# Altium PCB PCB2.PcbDoc
Units mil, origin at the board's own origin, x right, y up, seen from the top; angles counter-clockwise.
Board outline 6000 x 4000 mil, 2 copper layers (Top Layer, Bottom Layer); 27 components, 31 nets, 133 pads, 31 vias.
Unrouted connection lines stored in the file: 8.
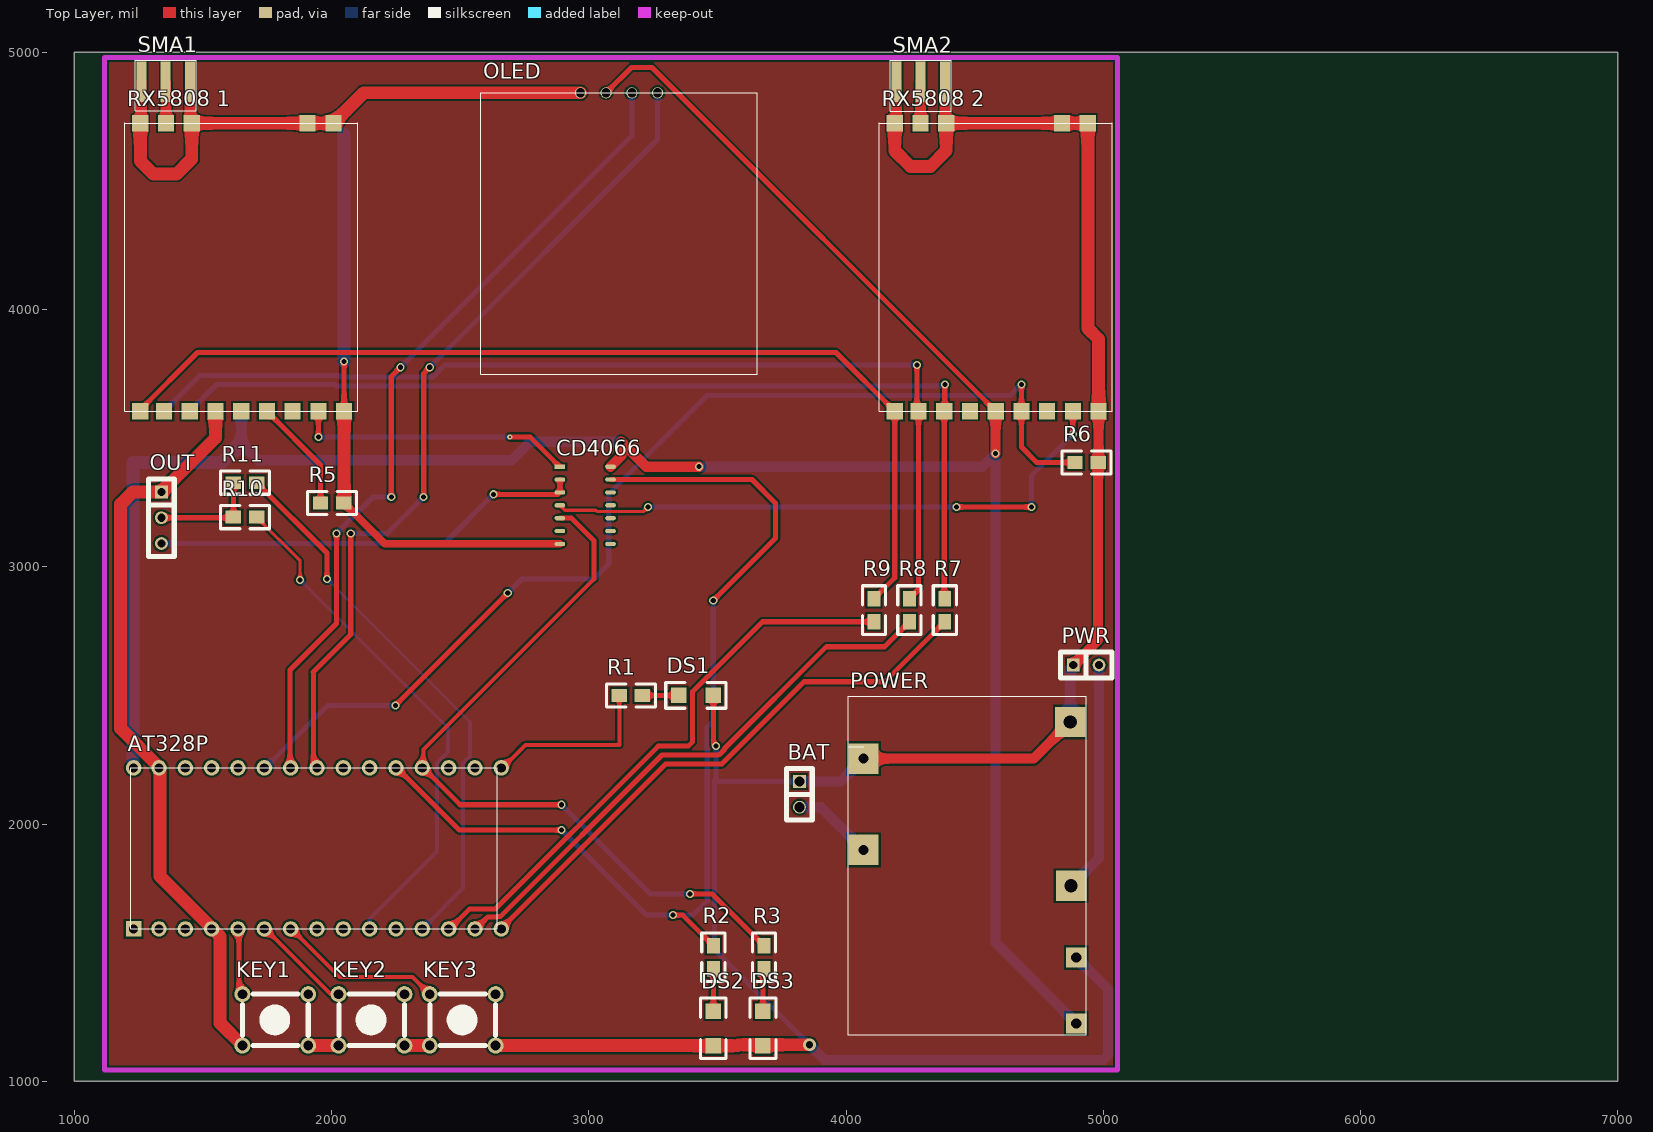
[diagram p0: Top Layer view]
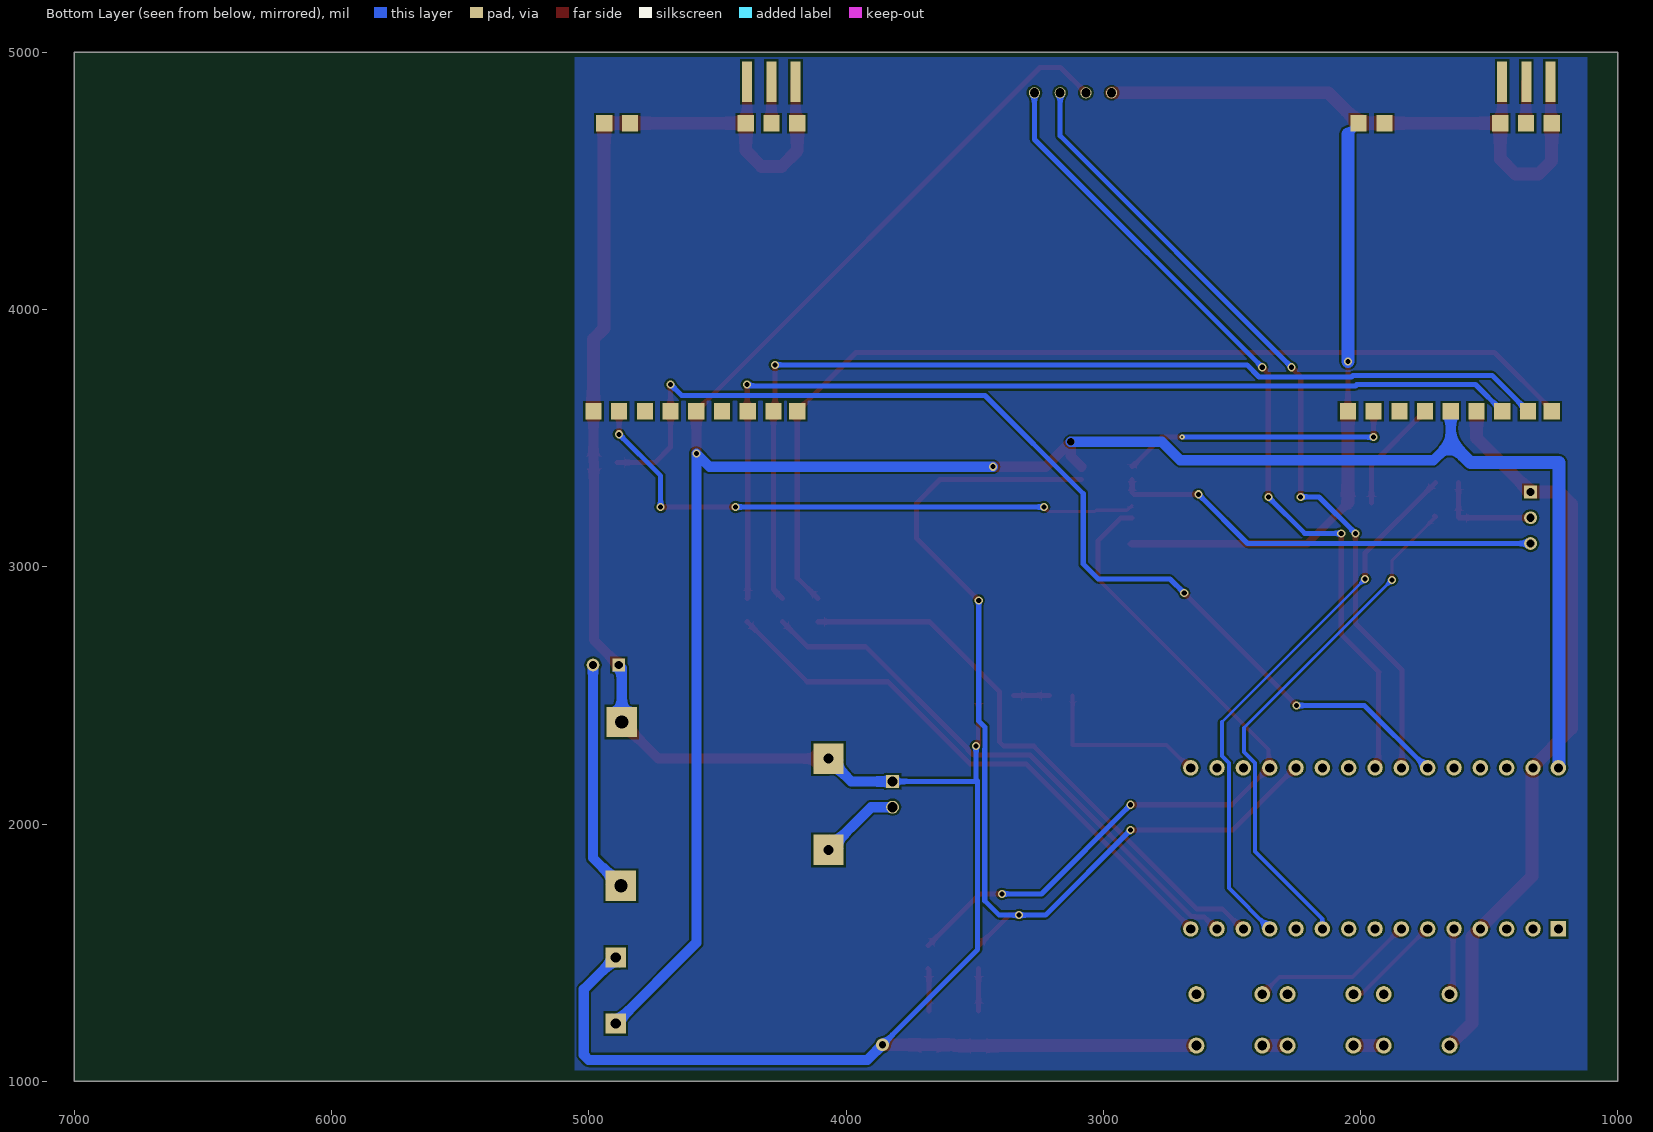
[diagram p1: Bottom Layer view, seen from below]

## Layer stack, top to bottom
Top Solder: solder mask 0.4, Solder Resist, Dk 3.5
Top Layer: signal copper 1.4
Dielectric 1: dielectric 12.6, FR-4, Dk 4.8
Bottom Layer: signal copper 1.4
Bottom Solder: solder mask 0.4, Solder Resist, Dk 3.5

## Board outline
1000,1000 7000,1000 7000,5000 1000,5000

## Design rules (kind name [scope] priority, off if disabled: settings)
Clearance [All] p1: gap=7.87 ignorepadtopadclearanceinfootprint=FALSE
PolygonConnect [All] p1: connectstyle=Relief reliefconductorwidth=10 reliefentries=4 polygonreliefangle="90 Angle" airgapwidth=10
RoutingVias [All] p1: holewidth=28 width=50 viastyle="Through Hole" minholewidth=28 minwidth=50 maxholewidth=28 maxwidth=50
SolderMaskExpansion [All] p1: expansion=4
Width [All] p1: maxlimit=19.68 minlimit=15.75 preferedwidth=19.68
30 further rules are at their usual default settings.

## Components (designator, comment, footprint, x,y, rotation, side; value= is the part's Value field where it differs from the comment)
AT328P "328P" 328 1230.98,1590.87 r90 top
BAT "CON2" SIP2#1 3818.9,2165.35 r270 top
CD4066 "CD4066" 4066 2887.72,3388.98 r0 top
DS1 "LED1" 1206 3349.25,2500 r0 top
DS2 "LED2" 1206 3484.25,1272.79 r270 top
DS3 "LED3" 1206 3677.17,1272.79 r270 top
KEY1 "UP" KEY_M 1909.45,1138.58 r180 top
KEY2 "MODE" KEY_M 2283.46,1138.58 r180 top
KEY3 "DOWN" KEY_M 2637.8,1138.58 r180 top
OLED "OLED" oled 2580.04,4842.52 r0 top
OUT "CON3" SIP3 1338.58,3290.55 r270 top
POWER "POWER" power 4009.06,1181.5 r90 top
PWR "CON1" SIP2#2 4883.46,2618.11 r0 top
R1 "330" 0805 3118.66,2500.06 r0 top
R2 "330" 0805 3484.32,1527.01 r270 top
R3 "330" 0805 3681.17,1527.01 r270 top
R5 "100K" 0805 2047.24,3248.03 r180 top
R6 "100K" 0805 4980.31,3405.51 r180 top
R7 "1K" 0805 4384.2,2876.22 r270 top
R8 "1K" 0805 4246.4,2876.22 r270 top
R9 "1K" 0805 4108.61,2876.22 r270 top
R10 "470" 0805 1618.66,3192.98 r0 top
R11 "1K" 0805 1618.66,3326.84 r0 top
"RX5808 1" "RX5808" rx5808 1256.06,4729.41 r0 top
"RX5808 2" "RX5808" rx5808 4189.13,4729.41 r0 top
SMA1 "SMA" SMA 1237.01,4807.48 r0 top
SMA2 "SMA" SMA 4172.05,4806.69 r0 top

## Footprints (in the part's own frame and the unit in brackets; to place one, negate y for a bottom-side part, rotate by r counter-clockwise, add the part's x,y. Pads: shape width x height; smd on the part's side, far side on the other; paste and mask are expansions set on the pad)
328 [mil]
  rect 60x60 hole 35.43: 1(1.26,0.28)
  round 60 hole 35.43: 2(1.26,-98.15) 3(1.26,-200.51) 4(1.26,-302.87) 5(1.26,-405.24) 6(1.26,-507.6) 7(1.26,-609.96) 8(1.26,-712.32) 9(1.26,-814.68) 10(1.26,-917.05) 11(1.26,-1019.41) 12(1.26,-1121.77) 13(1.26,-1224.13) 14(1.26,-1326.5) 15(1.26,-1428.86) 16(627.32,-1428.9) 17(627.32,-1326.54) 18(627.32,-1224.17) 19(627.32,-1121.81) 20(627.32,-1019.45) 21(627.32,-917.09) 22(627.32,-814.72) 23(627.32,-712.36) 24(627.32,-610) 25(627.32,-507.64) 26(627.32,-405.28) 27(627.32,-302.91) 28(627.32,-200.55) 29(627.32,-98.19) 30(627.32,0.24)
  silkscreen extent 1,-1413 627,12
0805 [mil]
  rect 60x50 smd: 1(0,-0.06) 2(90,-0.06)
  silkscreen extent -50,-45 140,45
1206 [mil]
  rect 60x60 smd: 1(0,0) 2(135,0)
  silkscreen extent -50,-50 185,50
4066 [mm]
  rect 1.05x0.42 smd: 1(0,0)
  oval 1.05x0.42 smd: 2(0,-1.27) 3(0,-2.54) 4(0,-3.81) 5(0,-5.08) 6(0,-6.35) 7(0,-7.62) 8(5,-7.62) 9(5,-6.35) 10(5,-5.08) 11(5,-3.81) 12(5,-2.54) 13(5,-1.27) 14(5,0)
KEY_M [mil]
  round 62 hole 38: 1(0,0) 1(255.91,0) 2(0,-200) 2(255.91,-200)
  silkscreen extent 0,-200 255,0
oled [mm]
  round 1.1 hole 0.9: 1(9.84,0) 2(12.38,0) 3(14.92,0) 4(17.467,0)
  silkscreen extent 0,-27.8 27.3,0
power [mm]
  rect 2x2 hole 1: 1(1.1,-22.5) 2(7.6,-22.5)
  rect 3x3 hole 1.3: 3(14.69,-22) 4(30.86,-21.91)
  rect 3x3 hole 1: 5(27.24,-1.5) 6(18.24,-1.5)
  silkscreen extent 0,-23.5 33.4,0.06
rx5808 [mm]
  rect 1.6x1.6 all layers, no hole: 1(0.016,-28.575) 2(2.356,-28.575) 3(4.896,-28.575) 4(7.436,-28.575) 5(9.976,-28.575) 6(12.516,-28.575) 7(15.056,-28.575) 8(17.596,-28.575) 9(20.136,-28.575) 10(0.016,-0.143) 11(2.556,-0.127) 12(5.096,-0.127) 13(16.536,-0.127) 14(19.076,-0.127)
  silkscreen extent -1.52,-28.58 21.48,-0.08
SIP2#1 [mm]
  rect 1.27x1.27 hole 1: 1(0,0)
  round 1.27 hole 1: 2(2.54,0)
  silkscreen extent -1.27,-1.27 3.81,1.27
SIP2#2 [mm]
  rect 1.27x1.27 hole 0.813: 1(0,0)
  round 1.27 hole 0.813: 2(2.54,0)
  silkscreen extent -1.27,-1.27 3.81,1.27
SIP3 [mil]
  rect 50x50 hole 32: 1(0,0)
  round 50 hole 32: 2(100,0) 3(200,0)
  silkscreen extent -50,-50 250,50
SMA [mm]
  rect 1x4 all layers, no hole: 1(0.61,2) 2(3,2) 3(5.39,2)
  silkscreen extent 0,-0.89 6,4.11

## Part data
DS1 DS3: library part LED2, "Typical RED, GREEN, YELLOW, AMBER GaAs LED", PackageDocument=Feb-2002, LatestRevisionDate=17-Jul-2002, LatestRevisionNote="Re-released for DXP Platform.", PackageReference=3.2X1.6X1.1, Published=8-Jun-2000, Publisher="Altium Limited"
DS2: "Typical RED, GREEN, YELLOW, AMBER GaAs LED", PackageDocument=Feb-2002, LatestRevisionDate=17-Jul-2002, LatestRevisionNote="Re-released for DXP Platform.", PackageReference=3.2X1.6X1.1, Published=8-Jun-2000, Publisher="Altium Limited"
KEY1 KEY2 KEY3: library part KEY_M
PWR: library part CON2
R1 R2 R3 R5 R6 R7 R8 R9 R10 R11: library part R
SMA1 SMA2: library part Component_1

## Via types
v1: diameter 31.5, hole 19.68, Top Layer to Bottom Layer, 28 vias
v2: diameter 28, hole 28, Top Layer to Bottom Layer, 1 vias
v3: diameter 19.68, hole 7.87, Top Layer to Bottom Layer, 1 vias
v4: diameter 50, hole 28, Top Layer to Bottom Layer, 1 vias

## Nets (pads, with @x,y where several pads share a name; then routed paths per layer and width w, separated by ;. In a path a pad name is that pad's centre, name@x,y a point inside that pad or via, vN(x,y) a via of type N, cw(c..) or ccw(c..) an arc to the next point about the centre after c; other vN are vias at no path point)
+5: "RX5808 1.5" "RX5808 2.5" AT328P.30 CD4066.14 OLED.2 POWER.1 | length 9547.6
  Top Layer w20: OLED.2 3165.87,4940.94 3245.35,4940.94 4581.89,3604.41
  Top Layer w39.37: CD4066.14 3126.38,3430.79 v2(3126.38,3485.83) 3223.23,3388.98 v1(3428.35,3388.98) ; v1(4581.89,3440.16) 4581.89,3604.41
  Bottom Layer w19.68: AT328P.30@1228.35,2220.59 AT328P.30
  Bottom Layer w39.37: 1648.82,3604.41 1648.82,3481.61 1716.46,3413.98 2700.91,3413.98 2772.76,3485.83 v2(3126.38,3485.83) ; v1(3428.35,3388.98) 4530.71,3388.98 v1(4581.89,3440.16) 4581.89,1537.8 POWER.1
  Bottom Layer w50: AT328P.30@1228.35,2220.59 1228.35,3405.58 1572.78,3405.58 1648.82,3481.61
GND: "RX5808 1.4" "RX5808 1.9" "RX5808 1.10" "RX5808 1.12" "RX5808 1.13" "RX5808 1.14" "RX5808 2.4" "RX5808 2.9" "RX5808 2.10" "RX5808 2.12" "RX5808 2.13" "RX5808 2.14" AT328P.4 AT328P.29 BAT.1 CD4066.7 DS1.2 DS2.2 DS3.2 KEY1.1 KEY2.1 KEY3.1 OLED.1 OUT.1 POWER.2 POWER.4 POWER.5 PWR.1 R5.1 R6.1 SMA1.1 SMA1.3 SMA2.1 SMA2.3 | length 17543.7
  Top Layer w19.68: 1256.69,4723.78 1261.02,4728.11 ; 1449.21,4731.89 1456.69,4724.41 ; 4189.76,4723.78 4196.06,4730.08 ; 4384.25,4729.92 4389.76,4724.41
  Top Layer w20: R5.1 R5.1@2048.82,3249.67 ; 2048.82,3604.41 v1(2048.82,3798) ; CD4066.7 CD4066.7@2895.28,3088.98 ; 3396.85,1138.58 3397.64,1137.8 ; DS1.2 3484.25,2307.09 3488.19,2303.14 v1(3494.48,2303.14) ; 3578.74,1137.8 3582.68,1141.73 ; v4@3855.47,1144.53 v4(3858.27,1141.73) ; R6.1 R6.1@4981.89,3407.15
  Top Layer w30: R5.1 2206.36,3088.98 CD4066.7
  Top Layer w39.37: 1261.02,4728.11 SMA1.1 ; 1449.21,4731.89 SMA1.3 ; POWER.5 4729.13,2253.94 POWER.4 ; 4196.06,4730.08 SMA2.1 ; 4384.25,4729.92 SMA2.3 ; PWR.1 4980.31,2714.96 R6.1 ; R6.1@4981.89,3407.15 4981.89,3604.41
  Top Layer w50: 1256.69,4723.78 1256.69,4577.31 1307,4527 1398,4527 1456.69,4585.69 1456.69,4724.41 1907.09,4724.41 2007.09,4724.41 2125.2,4842.52 OLED.1 ; 1548.82,3604.41 1548.82,3500.79 OUT.1 1227.56,3290.55 1180.31,3243.31 1180.31,2370.98 1333.11,2218.19 1333.11,1796.81 1537.8,1592.13 1566.93,1562.99 1566.93,1225.2 KEY1.1@1653.54,1138.58 ; KEY1.1@1909.45,1138.58 KEY2.1@2027.56,1138.58 ; R5.1@2048.82,3249.67 2048.82,3604.41 ; KEY2.1@2283.46,1138.58 KEY3.1@2381.89,1138.58 ; KEY3.1@2637.8,1138.58 3396.85,1138.58 ; 3397.64,1137.8 DS2.2 3578.74,1137.8 ; 3582.68,1141.73 v4(3858.27,1141.73) ; 4189.76,4723.78 4189.76,4617.24 4251,4556 4328,4556 4389.76,4617.76 4389.76,4724.41 4840.16,4724.41 4940.16,4724.41 4940.16,3926.84 4981.89,3885.11 4981.89,3604.41
  Bottom Layer w19.68: v1(3494.48,2303.14) 3494.48,2173.61 3488.19,2167.32 ; BAT.1 3490.16,2165.35 3488.19,2167.32 ; v4(3858.27,1141.73) 3488.19,1511.81 3488.19,2167.32 ; POWER.4 POWER.4@4883.46,2408.27 ; PWR.1@4871.65,2606.3 PWR.1 ; 5017.32,1358.27 5019.69,1358.27
  Bottom Layer w20: KEY1.1@1644.88,1129.92 KEY1.1@1653.54,1138.58 ; 2007.09,4724.41 2048.82,4682.68 ; KEY3.1@2637.8,1138.58 KEY3.1@2640.94,1141.73
  Bottom Layer w39.37: BAT.1 3979.53,2165.35 POWER.5 ; v4(3858.27,1141.73) 3917.32,1082.68 5000,1082.68 5019.69,1102.36 5019.69,1358.27 ; POWER.4 PWR.1@4871.65,2606.3 ; POWER.2 5017.32,1358.27
  Bottom Layer w50: v1(2048.82,3798) 2048.82,4682.68
NetAT328P_5: AT328P.5 KEY1.2 | length 270.2
  Top Layer w19.68: AT328P.5@1640.16,1592.13 1640.16,1351.97 KEY1.2@1653.54,1338.58
  Top Layer w20: KEY1.2@1653.54,1338.58 KEY1.2@1657.48,1342.52
  Bottom Layer w20: KEY1.2@1653.54,1338.58 KEY1.2@1657.48,1342.52
NetAT328P_6: AT328P.6 KEY2.2 | length 394
  Top Layer w15: KEY2.2@2027.56,1338.58 KEY2.2@2027.56,1342.52
  Top Layer w15.75: AT328P.6@1742.52,1592.13 1996.06,1338.58 KEY2.2@2027.56,1338.58
NetAT328P_7: AT328P.7 KEY3.2 | length 642
  Top Layer w15.75: AT328P.7@1844.88,1592.13 2031.5,1405.51 2314.96,1405.51 KEY3.2@2381.89,1338.58
NetAT328P_10: AT328P.10 R10.2 | length 2040.8
  Top Layer w11.81: R10.2 1877.95,3023.62 v1(1877.95,2948.82)
  Top Layer w20: R10.2 R10.2@1712.6,3196.85
  Bottom Layer w11.81: v1(1877.95,2948.82) 2452.76,2374.02
  Bottom Layer w15.75: AT328P.10 2148.03,1631.54 2409.41,1892.91 2409.41,2237.14 2452.76,2280.48 2452.76,2374.02
NetAT328P_12: AT328P.12 R11.2 | length 2155.3
  Top Layer w20: R11.2 1982.24,3053.19 v1(1982.24,2952.76)
  Bottom Layer w11.81: v1(1982.24,2952.76) 2538.54,2396.46
  Bottom Layer w15.75: AT328P.12 2511.77,1751.14 2511.77,2237.14 2538.54,2263.91 2538.54,2396.46
NetAT328P_13: AT328P.13 R9.2 | length 2258.5
  Top Layer w19.68: AT328P.13@2459.06,1592.13 2537.01,1670.08 2637.57,1670.08 3270.17,2302.68 3386.93,2302.68 3404.1,2319.84 3404.1,2515.2 3675.12,2786.22
  Top Layer w20: 3675.12,2786.22 R9.2
NetAT328P_14: AT328P.14 R8.2 | length 2182.1
  Top Layer w19.68: AT328P.14@2561.42,1592.13 2607.48,1638.19 2642.36,1638.19 2644.01,1639.84 2656.38,1639.84 3284.53,2267.99 3502.53,2267.99 3502.69,2268.15
  Top Layer w20: 3502.69,2268.15 3504.06,2269.52 3508.41,2269.52 3528.1,2289.22 3528.1,2293.57 3923.54,2689 4149.12,2689 R8.2
NetAT328P_15: AT328P.15 R7.2 | length 2218.4
  Top Layer w19.68: AT328P.15@2663.78,1592.13 2663.78,1597.96 3298.96,2233.15
  Top Layer w20: 3298.96,2233.15 3517.18,2233.15 3837.03,2553 4150.91,2553 R7.2
NetAT328P_16: AT328P.16 R1.1 | length 684.3
  Top Layer w15.75: AT328P.16@2663.82,2218.19 2753.27,2307.64 3118.66,2307.64 R1.1
NetAT328P_19: AT328P.19 CD4066.5 R3.1 | length 2937.3
  Top Layer w15.75: AT328P.19@2356.73,2218.19 2356.73,2289.8 3019.68,2952.76
  Top Layer w19.68: AT328P.19@2356.73,2218.19 2500.12,2074.8 v1(2893.7,2074.8)
  Top Layer w20: CD4066.5 2933.07,3188.98 3019.68,3102.36 3019.68,2952.76 ; v1(3393.7,1728.35) 3479.76,1728.35 R3.1
  Bottom Layer w20: v1(2893.7,2074.8) 3240.16,1728.35 v1(3393.7,1728.35)
NetAT328P_20: AT328P.20 CD4066.13 R2.1 | length 4008.2
  Top Layer w19.68: AT328P.20@2254.37,2218.19 2496.18,1976.38 v1(2893.7,1976.38)
  Top Layer w20: CD4066.13 3634.02,3338.98 3726.02,3246.98 3726.02,3110.81 v1(3484,2868.79) ; v1(3326.77,1645.67) 3365.59,1645.67 R2.1
  Bottom Layer w19.68: v1(2893.7,1976.38) 3224.41,1645.67 v1(3326.77,1645.67) 3404.72,1645.67 3460.63,1701.57 3460.63,2291.51 3460.47,2291.67 3460.47,2377.17 3484,2400.69 v1(3484,2868.79)
NetAT328P_23: AT328P.23 OLED.4 | length 3269.3
  Top Layer w19.68: 1929.13,2590.55 1929.13,2236.34 AT328P.23@1947.28,2218.19
  Top Layer w20: 1929.13,2590.55 2074.8,2736.22 v1(2074.8,3129.92) ; v1(2358.27,3271.65) 2358.27,3751.97 v1(2381.89,3775.59)
  Bottom Layer w20: v1(2074.8,3129.92) 2216.54,3129.92 v1(2358.27,3271.65) ; v1(2381.89,3775.59) 3267.72,4661.42 OLED.4
NetAT328P_24: AT328P.24 OLED.3 | length 3218.9
  Top Layer w19.68: 1838.58,2598.43 1838.58,2224.53 AT328P.24@1844.92,2218.19
  Top Layer w20: 1838.58,2598.43 2019.68,2779.53 v1(2019.68,3129.92) ; v1(2232.28,3271.65) 2232.28,3740.16 v1(2267.72,3775.59)
  Bottom Layer w20: v1(2019.68,3129.92) 2161.42,3271.65 v1(2232.28,3271.65) ; v1(2267.72,3775.59) 3167.44,4675.31 OLED.3
NetAT328P_25: "RX5808 2.6" AT328P.25 R6.2 | length 4193.7
  Top Layer w20: v1(2248.03,2460.63) v1(2685.04,2897.64) ; v1(4681.89,3708.66) 4681.89,3604.41 4681.89,3465.35 4741.67,3405.58 R6.2
  Bottom Layer w19.68: AT328P.25@1742.56,2218.19 1984.25,2459.88 1984.25,2460.63
  Bottom Layer w20: 1984.25,2460.63 v1(2248.03,2460.63) ; v1(2685.04,2897.64) 2740.16,2952.76 3019.68,2952.76 3077.72,3010.79 3077.72,3283.98 3459.09,3665.35 4638.58,3665.35 v1(4681.89,3708.66)
NetBAT_2: BAT.2 POWER.6 | length 317.9
  Bottom Layer w39.37: BAT.2 3902.36,2065.35 POWER.6
NetCD4066_1: "RX5808 1.8" CD4066.1 | length 1087
  Top Layer w19.68: v3(2692.91,3503.94) 2772.76,3503.94 CD4066.1
  Top Layer w20: v1(1948.82,3503.94) 1948.82,3604.41
  Bottom Layer w20: v1(1948.82,3503.94) v3(2692.91,3503.94)
NetCD4066_2: CD4066.2 CD4066.3 OUT.3 | length 1681.3
  Top Layer w19.68: v1(2629.92,3281.77) 2880.51,3281.77 CD4066.3 CD4066.2
  Bottom Layer w20: OUT.3 2438.7,3090.55 v1(2629.92,3281.77)
NetCD4066_4: "RX5808 2.8" CD4066.4 | length 2300.1
  Top Layer w11.81: CD4066.4 2907.01,3219.68 3026.77,3219.68 3031.5,3214.96 3212.99,3214.96 v1(3230.32,3232.28)
  Top Layer w20: v1(4429.13,3232.28) v1(4720.47,3232.28) ; 4874.02,3612.28 4881.89,3604.41 4881.89,3515.11 v1(4882,3515)
  Bottom Layer w20: v1(3230.32,3232.28) v1(4429.13,3232.28) ; v1(4720.47,3232.28) 4720.47,3353.47 v1(4882,3515)
NetDS1_1: DS1.1 R1.2 | length 140.6
  Top Layer w20: R1.2 DS1.1
NetDS2_1: DS2.1 R2.2 | length 164.2
  Top Layer w20: DS2.1 R2.2
NetDS3_1: DS3.1 R3.2 | length 165.8
  Top Layer w20: DS3.1 3677.17,1433.07 R3.2
NetOUT_2: OUT.2 R10.1 R11.1 | length 418.3
  Top Layer w19.68: OUT.2 R10.1@1616.3,3190.55 ; R10.1 R11.1
  Top Layer w20: OUT.2 OUT.2@1340.94,3192.91 ; R10.1@1616.3,3190.55 R10.1
NetPOWER_3: POWER.3 PWR.2 | length 903.1
  Bottom Layer w39.37: POWER.3 4983.46,1868.11 PWR.2
NetR5_2: "RX5808 1.6" R5.2 | length 442.6
  Top Layer w19.68: 1748.82,3604.41 1957.24,3395.98 R5.2
NetR7_1: "RX5808 1.3" "RX5808 2.3" R7.1 | length 3817.4
  Top Layer w20: R7.1 4381.89,2878.46 4381.89,3604.41 4384.13,3606.65 v1(4384.13,3708.66)
  Bottom Layer w20: 1448.82,3604.41 1553.07,3708.66 2014.33,3708.66 2019.82,3703.16 4378.64,3703.16 v1(4384.13,3708.66)
NetR8_1: "RX5808 1.2" "RX5808 2.2" R8.1 | length 3932.2
  Top Layer w20: R8.1 4281.89,2911.77 4281.89,3604.41 4275.59,3610.71 v1(4275.59,3785)
  Bottom Layer w20: 1348.82,3604.41 1488.07,3743.66 2028.82,3743.66 2034.32,3738.16 2393.96,3738.16 2440.8,3785 v1(4275.59,3785)
NetR9_1: "RX5808 1.1" "RX5808 2.1" R9.1 | length 3887.9
  Top Layer w20: 1256.69,3604.41 1256.69,3610.63 1479.06,3833 3961.17,3833 4189.76,3604.41 4189.76,2957.44 R9.1
"NetRX5808 1_11": "RX5808 1.11" SMA1.2 | length 162.5
  Top Layer w19.68: SMA1.2 SMA1.2@1356.69,4884.65
  Top Layer w39.37: 1356.69,4724.41 SMA1.2@1356.69,4884.65
"NetRX5808 2_11": "RX5808 2.11" SMA2.2 | length 161.2
  Top Layer w19.68: 4289.76,4724.41 4290.16,4724.8
  Top Layer w39.37: 4290.16,4724.8 SMA2.2
pads on no net: "RX5808 1.7" "RX5808 2.7" AT328P.1 AT328P.2 AT328P.3 AT328P.8 AT328P.9 AT328P.11 AT328P.17 AT328P.18 AT328P.21 AT328P.22 AT328P.26 AT328P.27 AT328P.28 CD4066.6 CD4066.8 CD4066.9 CD4066.10 CD4066.11 CD4066.12

## Polygon pours and split planes (outlines as drawn)
no net on Top Layer "Top Layer-No Net" (solid, pour order 0): 1117.99,4980 5055,4980 5055,1042.99 1117.99,1042.99 1117.99,4980
no net on Bottom Layer "Bottom Layer-No Net" (solid, pour order 2): 1117.99,4980 5055,4980 5055,1042.99 1117.99,1042.99 1117.99,4980

## Keep-outs
Top Layer:
  lines w20: 1117.99,1042.99 1117.99,4980 5055,4980 5055,1042.99 1117.99,1042.99